# Altium PCB PCB_EasyEDA_2024-05-05.pcbdoc
Units mm, origin at the board's own origin, x right, y up, seen from the top; angles counter-clockwise.
Board outline 101.65 x 106.65 mm, 2 copper layers (Top Layer, Bottom Layer); 21 components, 43 nets, 90 pads, 0 vias.
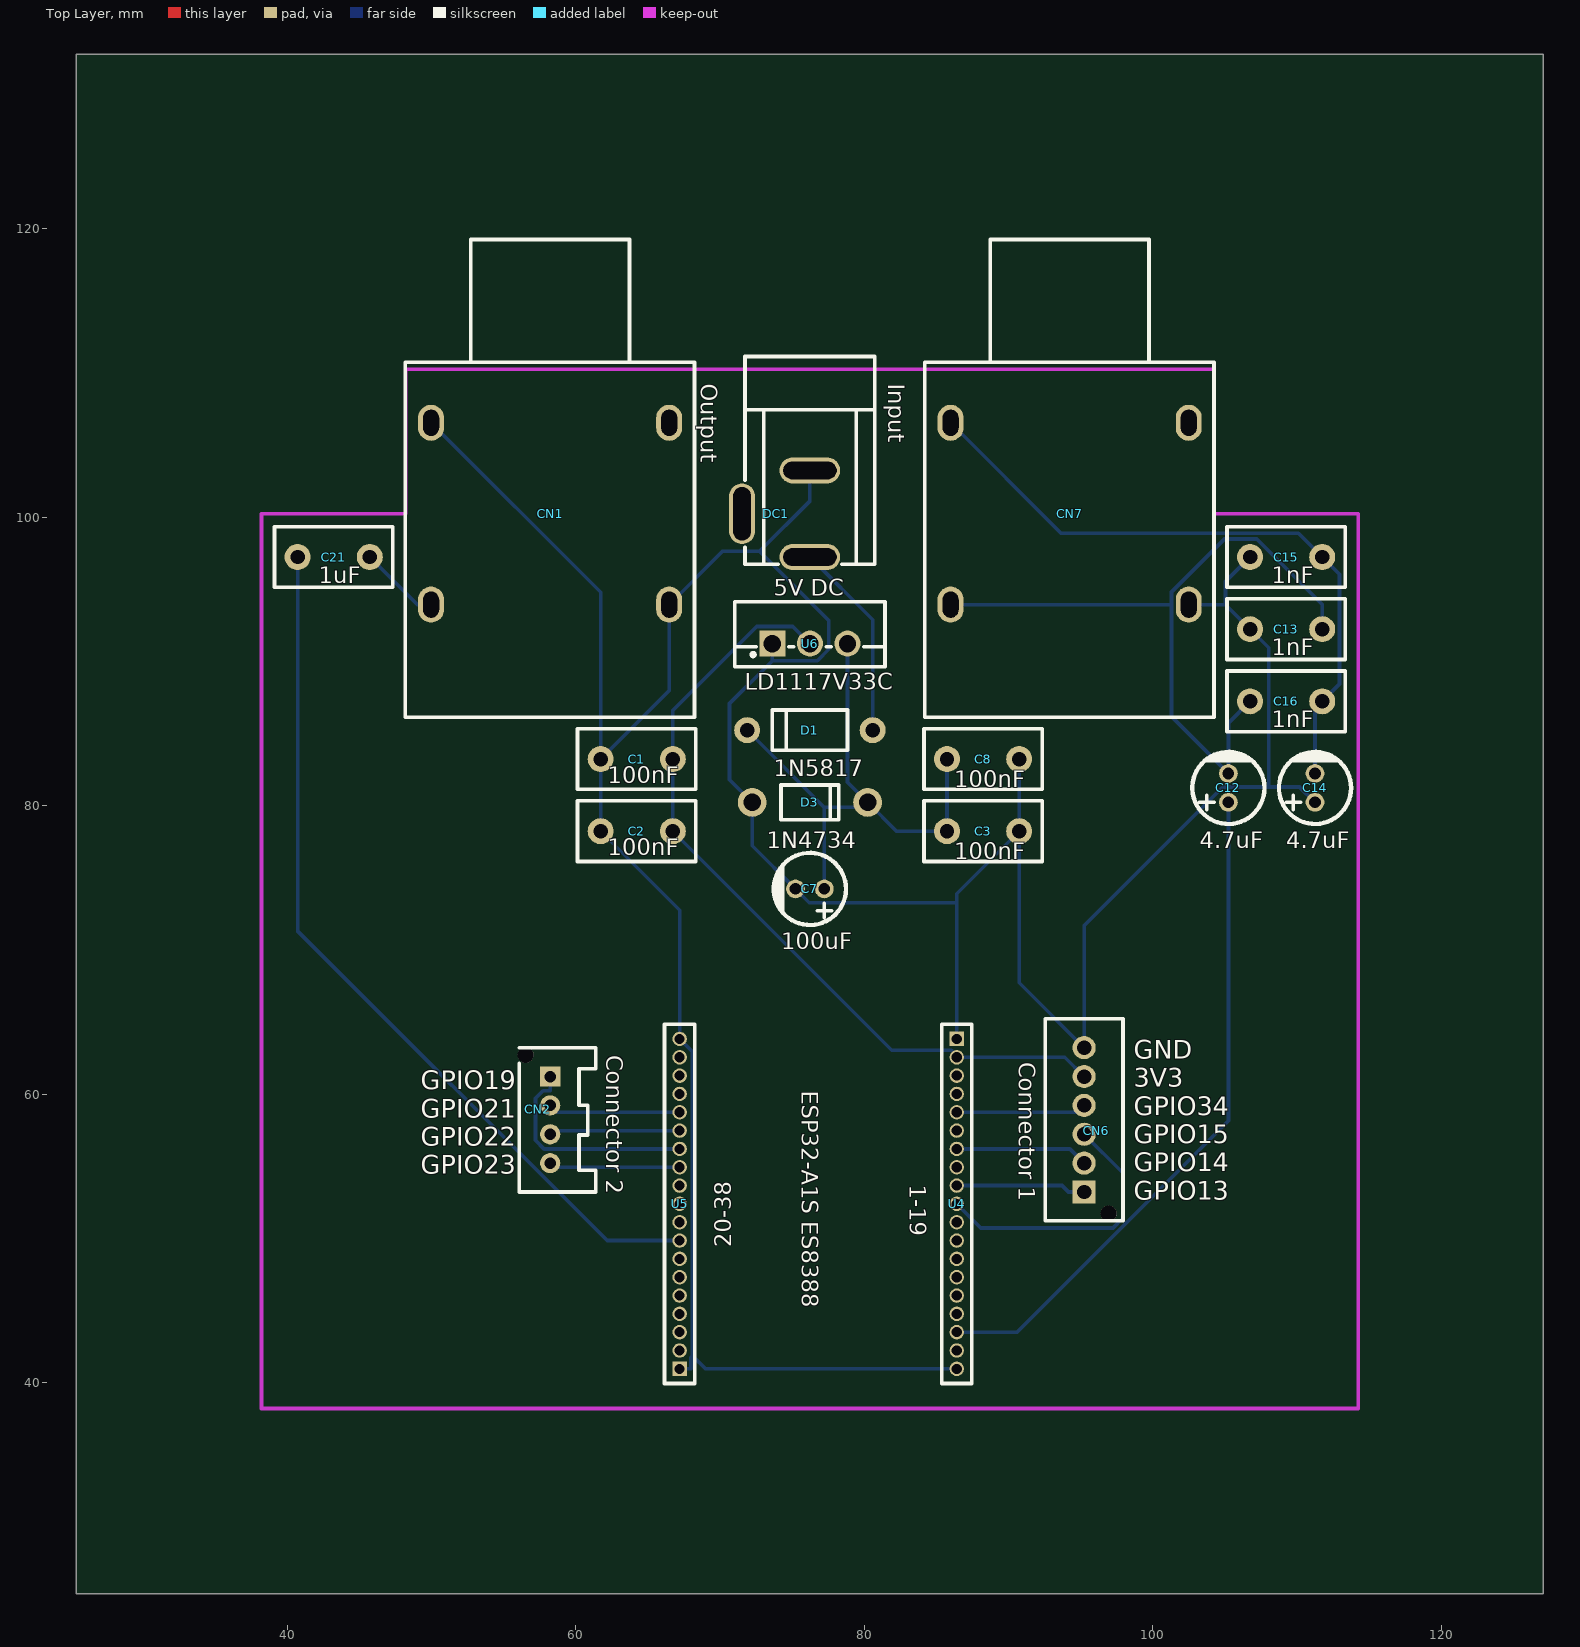
[diagram p0: Top Layer view]
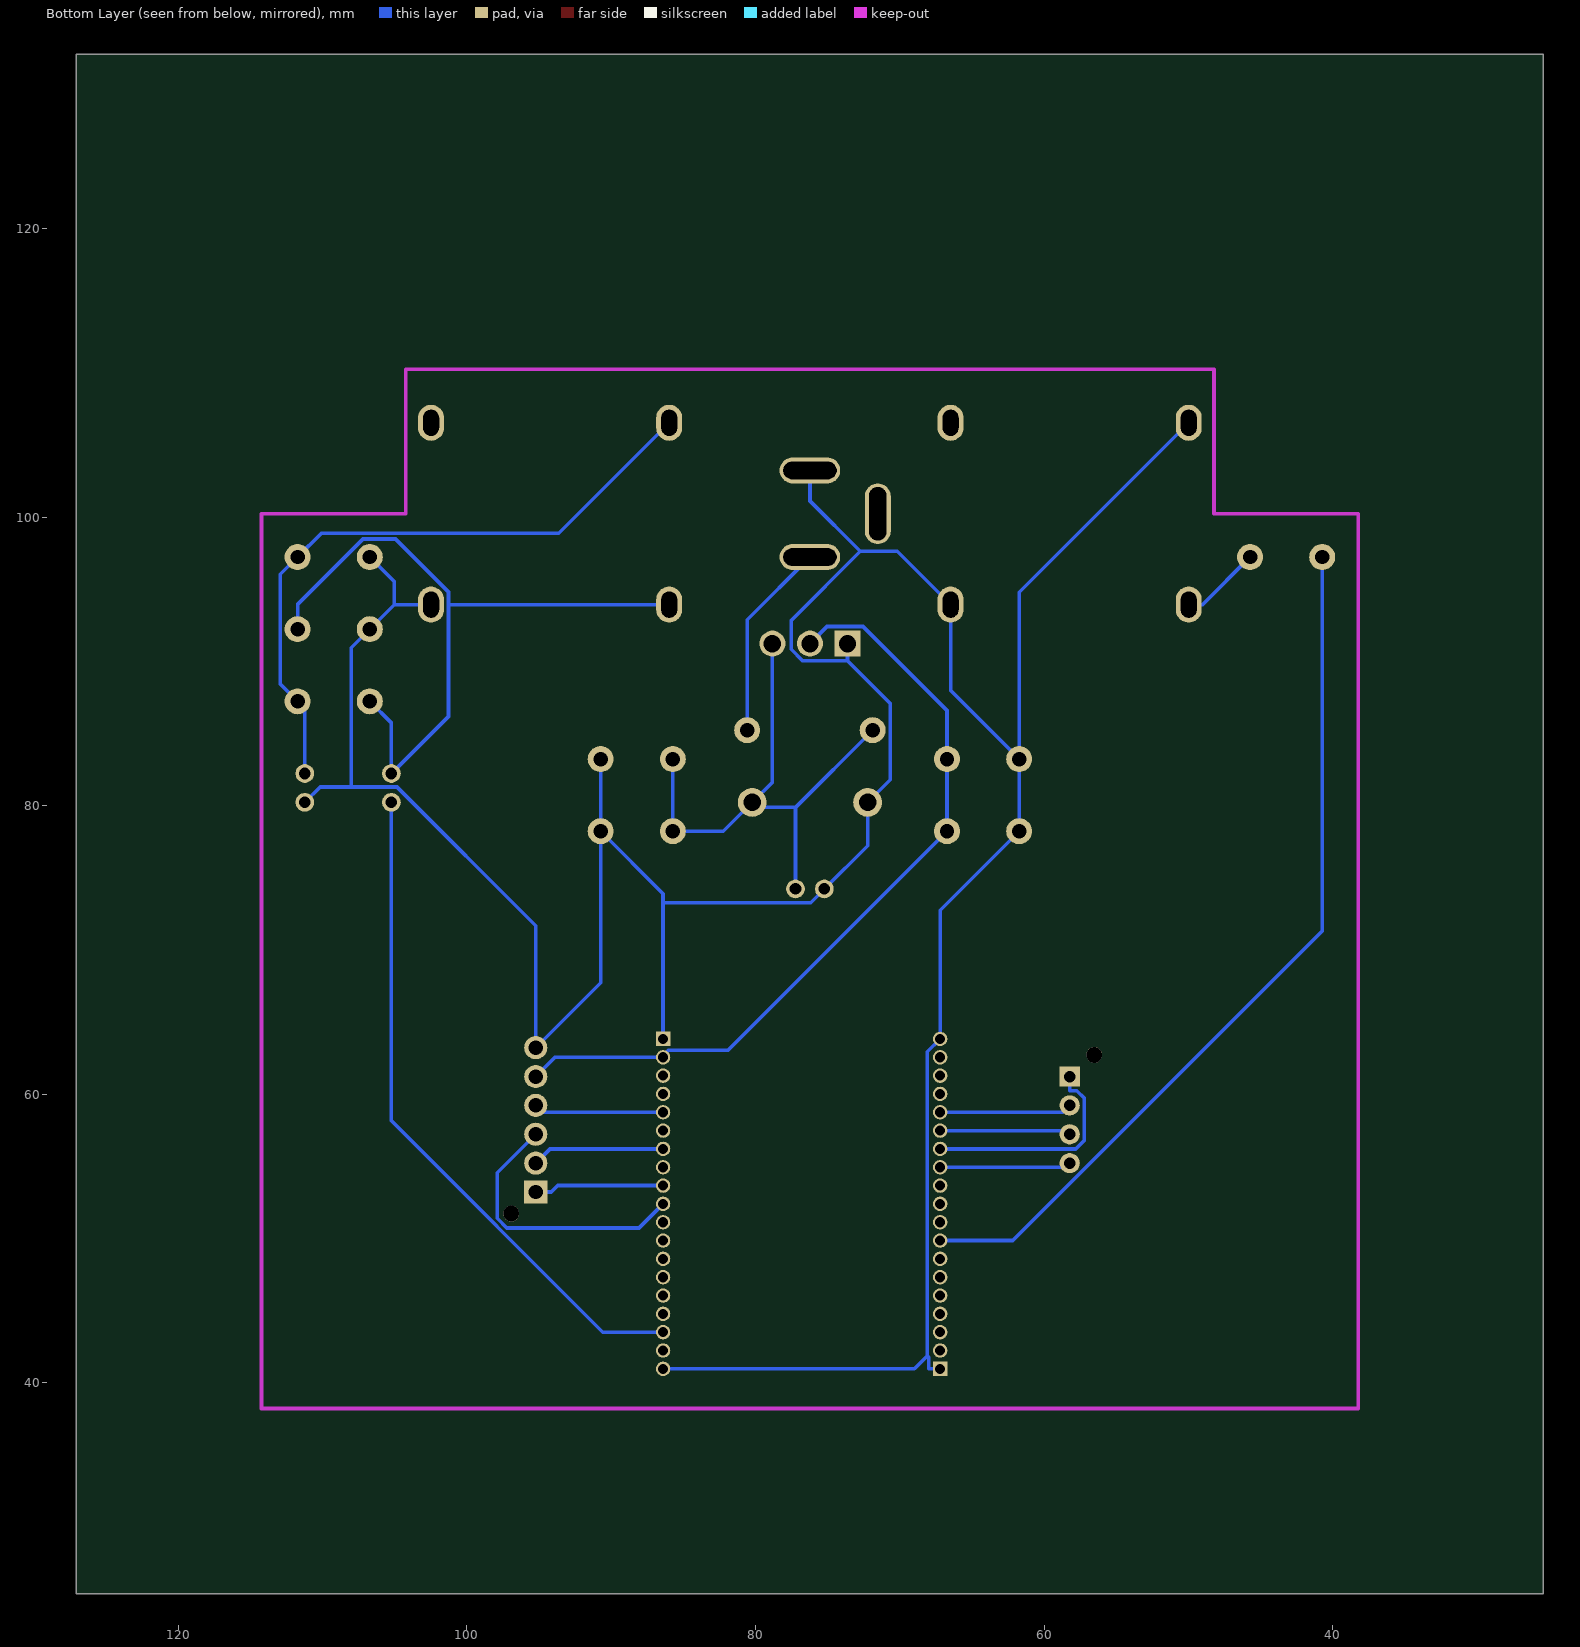
[diagram p1: Bottom Layer view, seen from below]

## Layer stack, top to bottom
Top Solder: solder mask 0.0102, Solder Resist, Dk 3.5
Top Layer: signal copper 0.0356
Dielectric1: dielectric 0.32, FR-4, Dk 4.8
Bottom Layer: signal copper 0.0356
Bottom Solder: solder mask 0.0102, Solder Resist, Dk 3.5

## Board outline
127.054,25.4 25.4,25.4 25.4,132.054 127.054,132.054

## Design rules (kind name [scope] priority, off if disabled: settings)
Clearance [All] p1: gap=0.254 ignorepadtopadclearanceinfootprint=FALSE except(0: Arc-Hole Track-Hole SMDPad-Hole THPad-Hole Via-Hole Fill-Hole Poly-Hole Region-Hole Text-Hole)
PolygonConnect [All] p1: connectstyle=Relief reliefconductorwidth=0.254 reliefentries=4 polygonreliefangle="90 Angle" airgapwidth=0.254
RoutingVias [All] p1: holewidth=0.711 width=1.27 viastyle="Through Hole" minholewidth=0.711 minwidth=1.27 maxholewidth=0.711 maxwidth=1.27
SolderMaskExpansion [All] p1: expansion=0.102 istentingtop=FALSE
Width [All] p1: maxlimit=0.254 minlimit=0.254 preferedwidth=0.254
30 further rules are at their usual default settings.

## Components (designator, comment, footprint, x,y, rotation, side; value= is the part's Value field where it differs from the comment)
C1 "100nF" CAP-TH_L8.0-W4.0-P5.00-D0.7 64.227,83.227 r0 top
C2 "100nF" CAP-TH_L8.0-W4.0-P5.00-D0.7 64.227,78.227 r0 top
C3 "100nF" CAP-TH_L8.0-W4.0-P5.00-D0.7 88.227,78.227 r180 top
C7 "100uF" CAP-TH_BD5.0-P2.00-D0.8-FD 76.227,74.227 r180 top
C8 "100nF" CAP-TH_L8.0-W4.0-P5.00-D0.7 88.227,83.227 r180 top
C12 "4.7uF" CAP-TH_BD5.0-P2.00-D0.8-FD 105.227,81.227 r90 top
C13 "1nF" CAP-TH_L8.0-W4.0-P5.00-D0.7 109.227,92.227 r0 top
C14 "4.7uF" CAP-TH_BD5.0-P2.00-D0.8-FD 111.227,81.227 r90 top
C15 "1nF" CAP-TH_L8.0-W4.0-P5.00-D0.7 109.227,97.227 r0 top
C16 "1nF" CAP-TH_L8.0-W4.0-P5.00-D0.7 109.227,87.227 r0 top
C21 "1uF" CAP-TH_L8.0-W4.0-P5.00-D0.7 43.227,97.227 r0 top
CN1 "Output" AUDIO-TH_CK6.35-3-15-6 58.227,100.227 r270 top
CN2 "Connector 2" CONN-TH_B04B-PASK-1-LF-SN 58.227,58.227 r90 top
CN6 "Connector 1" CONN-TH_B06B-PASK-1-LF-SN 95.227,58.227 r270 top
CN7 "Input" AUDIO-TH_CK6.35-3-15-6 94.227,100.227 r270 top
D1 "1N5817" DO-41_BD2.4-L4.7-P8.70-D0.9-RD 76.227,85.227 r0 top
D3 "1N4734" DO-41G_BD2.4-L4.0-P8.00-D0.7-RD 76.227,80.227 r180 top
DC1 "5V DC" CONN-TH_DC-005-2.5A-2.0 73.876,100.227 r270 top
U4 "1-19" HDR-TH_19P-P1.27-V-M 86.402,52.402 r270 top
U5 "20-38" HDR-TH_19P-P1.27-V-M 67.202,52.402 r90 top
U6 "LD1117V33C" ITO-220AB-3_L10.2-W4.5-P2.60-L 76.227,91.227 r0 top

## Footprints (in the part's own frame and the unit in brackets; to place one, negate y for a bottom-side part, rotate by r counter-clockwise, add the part's x,y. Pads: shape width x height; smd on the part's side, far side on the other; paste and mask are expansions set on the pad)
AUDIO-TH_CK6.35-3-15-6 [mm]
  oval 2.5x1.8 hole 1.1 slot 1.8 at 0 deg paste+0 mask+0.051: 1(-6.3,-8.25) 2(-6.3,8.25) 3(6.3,-8.25) 4(6.3,8.25)
  silkscreen extent -19,-10.03 14.1,10
CAP-TH_BD5.0-P2.00-D0.8-FD [mm]
  round 1.3 hole 0.8 paste+0 mask+0.051: 1(-1,0) 2(1,0)
  silkscreen extent -2.5,-2.5 2.5,2.5
CAP-TH_L8.0-W4.0-P5.00-D0.7 [mm]
  round 1.8 hole 1 paste+0 mask+0.051: 1(-2.5,0) 2(2.5,0)
  silkscreen extent -4.1,-2.1 4.1,2.1
CONN-TH_B04B-PASK-1-LF-SN [mm]
  rect 1.4x1.4 hole 0.8 paste+0 mask+0.051: 1(3,0)
  round 1.4 hole 0.8 paste+0 mask+0.051: 2(1,0) 3(-1,0) 4(-3,0)
  round 1.1 hole 1.1 unplated paste+0: ""(4.5,1.7)
  silkscreen extent -5,-3.15 5,2.15
CONN-TH_B06B-PASK-1-LF-SN [mm]
  rect 1.6x1.6 hole 1 paste+0 mask+0.051: 1(5,0)
  round 1.6 hole 1 paste+0 mask+0.051: 2(3,0) 3(1,0) 4(-1,0) 5(-3,0) 6(-5,0)
  round 1.1 hole 1.1 unplated paste+0: ""(6.5,1.7)
  silkscreen extent -7,-2.7 7,2.7
CONN-TH_DC-005-2.5A-2.0 [mm]
  oval 1.8x4.2 hole 1.2 slot 3.7 at 90 deg paste+0 mask+0.051: 1(3,2.35) 2(-3,2.35)
  oval 4.2x1.8 hole 1.2 slot 3.7 at 0 deg paste+0 mask+0.051: 3(0,-2.35)
  silkscreen extent -10.9,-2.15 3.5,6.85
DO-41_BD2.4-L4.7-P8.70-D0.9-RD [mm]
  round 1.8 hole 1 paste+0 mask+0.051: 1(-4.35,0) 2(4.35,0)
  silkscreen extent -2.6,-1.4 2.6,1.4
DO-41G_BD2.4-L4.0-P8.00-D0.7-RD [mm]
  round 2 hole 1.2 paste+0 mask+0.051: 1(-4,0) 2(4,0)
  silkscreen extent -2,-1.2 2,1.2
HDR-TH_19P-P1.27-V-M [mm]
  rect 1x1 hole 0.7 paste+0 mask+0.051: 1(-11.43,0)
  round 1 hole 0.7 paste+0 mask+0.051: 2(-10.16,0) 3(-8.89,0) 4(-7.62,0) 5(-6.35,0) 6(-5.08,0) 7(-3.81,0) 8(-2.54,0) 9(-1.27,0) 10(0,0) 11(1.27,0) 12(2.54,0) 13(3.81,0) 14(5.08,0) 15(6.35,0) 16(7.62,0) 17(8.89,0) 18(10.16,0) 19(11.43,0)
  silkscreen extent -12.44,-1.05 12.44,1.05
ITO-220AB-3_L10.2-W4.5-P2.60-L [mm]
  rect 1.8x1.8 hole 1.2 paste+0 mask+0.051: 1(-2.6,0)
  round 1.8 hole 1.2 paste+0 mask+0.051: 2(0,0) 3(2.6,0)
  silkscreen extent -5.2,-1.6 5.2,2.9

## Nets (pads, with @x,y where several pads share a name; then routed paths per layer and width w, separated by ;. In a path a pad name is that pad's centre, name@x,y a point inside that pad or via, vN(x,y) a via of type N, cw(c..) or ccw(c..) an arc to the next point about the centre after c; other vN are vias at no path point)
3.3V: C1.2 C2.2 CN6.5 U4.2 U6.2 | length 60.1
  Bottom Layer w0.254: U6.2 75.039,92.414 72.542,92.414 66.727,86.599 C1.2 C2.2 81.902,63.052 86.03,63.052 86.519,62.562 90.147,62.562 ; U4.2 90.147,62.562 ; CN6.5 93.892,62.562 90.147,62.562
5VDCIN: D1.2 DC1.1 | length 13.8
  Bottom Layer w0.254: DC1.1 80.577,92.876 D1.2
CN1_2: CN1.2
CN1_3: C21.2 CN1.3 | length 5.6
  Bottom Layer w0.254: C21.2 49.027,93.927 CN1.3
CN7_1: C14.2 C15.2 C16.2 CN7.1 | length 45.8
  Bottom Layer w0.254: CN7.1 93.626,98.878 110.076,98.878 C15.2 112.929,96.025 112.929,88.429 C16.2 111.227,86.727 C14.2
CN7_2: CN7.2
CN7_3: C12.2 C13.2 C16.1 CN7.3 | length 50.7
  Bottom Layer w0.254: CN7.3 101.277,93.927 ; C16.1 105.227,85.727 C12.2 101.277,86.177 101.277,93.927 ; C13.2 111.727,93.935 107.192,98.47 104.947,98.47 101.277,94.799 101.277,93.927
D1_1: C3.2 C7.1 C8.2 D1.1 D3.1 U6.3 | length 39.3
  Bottom Layer w0.254: D1.1 77.227,79.877 ; C7.1 77.227,79.877 ; U6.3 78.827,81.627 D3.1 ; C8.2 C3.2 82.227,78.227 D3.1 ; 77.227,79.877 79.877,79.877 D3.1
DC1_3: DC1.3
EN: U5.16
GND: C1.1 C2.1 C3.1 C7.2 C8.1 C13.1 C14.1 C15.1 CN1.1 CN1.4 CN6.6 CN7.4 D3.2 DC1.2 U4.1 U4.19 U5.1 U5.19 U6.1 | length 252.1
  Bottom Layer w0.254: CN1.1 61.727,94.777 C1.1 ; U5.1 67.982,40.972 67.982,41.752 68.095,41.865 ; U6.1 73.627,90.046 ; DC1.2 76.226,101.113 72.737,97.624 ; U4.19 68.987,40.972 68.095,41.865 ; U4.1 86.402,73.276 ; C8.1 C3.1 ; CN7.4 105.027,93.927 ; C15.1 105.027,95.527 105.027,93.927 ; C14.1 110.158,81.296 108.013,81.296 ; C1.1 66.477,87.977 CN1.4 70.175,97.624 72.737,97.624 ; C1.1 C2.1 67.202,72.752 U5.19 68.095,62.94 68.095,41.865 ; 72.737,97.624 77.527,92.835 77.527,90.829 76.744,90.046 73.627,90.046 ; 73.627,90.046 70.656,87.075 70.656,81.798 D3.2 72.227,77.227 C7.2 76.178,73.276 86.402,73.276 ; 86.402,73.276 86.402,73.902 C3.1 ; C3.1 90.727,67.727 CN6.6 95.227,71.682 104.841,81.296 108.013,81.296 ; 105.027,93.927 C13.1 108.013,90.94 108.013,81.296
GPIO0: U4.6
GPIO2: U4.11
GPIO4: U4.12
GPIO5: U5.10
GPIO12: U4.8
GPIO13: CN6.1 U4.9 | length 9
  Bottom Layer w0.254: U4.9 93.702,53.672 94.148,53.227 CN6.1@95.227,53.227
GPIO14: CN6.2 U4.7 | length 9.2
  Bottom Layer w0.254: U4.7 94.242,56.212 CN6.2
GPIO15: CN6.3 U4.10 | length 19.4
  Bottom Layer w0.254: U4.10 88.069,50.736 97.229,50.736 97.896,51.402 97.896,54.558 CN6.3
GPIO18: U5.11
GPIO19: CN2.1 U5.13 | length 15.4
  Bottom Layer w0.254: CN2.1 58.227,60.248 57.737,60.248 57.208,59.718 57.208,56.813 57.808,56.212 U5.13
GPIO21: CN2.2 U5.15 | length 9.2
  Bottom Layer w0.254: CN2.2 58.702,58.752 U5.15
GPIO22: CN2.3 U5.14 | length 9.1
  Bottom Layer w0.254: CN2.3 58.482,57.482 U5.14
GPIO23: CN2.4 U5.12 | length 9.1
  Bottom Layer w0.254: CN2.4 58.512,54.942 U5.12
GPIO34: CN6.4 U4.5 | length 9
  Bottom Layer w0.254: U4.5 94.752,58.752 CN6.4
HBIAS: U4.13
HPOUTL: C21.1 U5.8 | length 61.3
  Bottom Layer w0.254: C21.1 40.727,71.316 62.181,49.862 U5.8
HPOUTR: U5.9
LINEINL: U5.3
LINEINR: U5.2
MBIAS: U4.16
MIC1N: U4.15
MIC1P: C12.1 U4.17 | length 47
  Bottom Layer w0.254: U4.17 90.583,43.512 105.227,58.156 C12.1
MIC2N: U4.14
MIC2P: U4.18
RXD0: U5.18
SENSOR_VN: U4.3
SENSOR_VP: U4.4
SPOLN: U5.7
SPOLP: U5.6
SPORN: U5.5
SPORP: U5.4
TXD0: U5.17
pads on no net: CN2. CN6.

## Silkscreen, mask and mechanical layers (free items; w line width, h text height)
Top Overlay:
  text "ESP32-A1S ES8388" at 75.655,60.227 h1.14 r270
  text "GPIO19 / GPIO21 / GPIO22 / GPIO23" at 49.276,54.483 h1.3
  text "GND / 3V3 / GPIO34 / GPIO15 / GPIO14 / GPIO13" at 98.679,52.705 h1.3